# Altium PCB R45_PCBM.PcbDoc (part 3 of 8)
Units mm, origin at the board's own origin, x right, y up, seen from the top; angles counter-clockwise.
Board outline 109 x 109 mm, 4 copper layers (Top Layer, Layer 1, Layer 2, Bottom Layer), stack 0.98 mm thick; 9 components, 0 nets, 14 pads, 1504 vias.
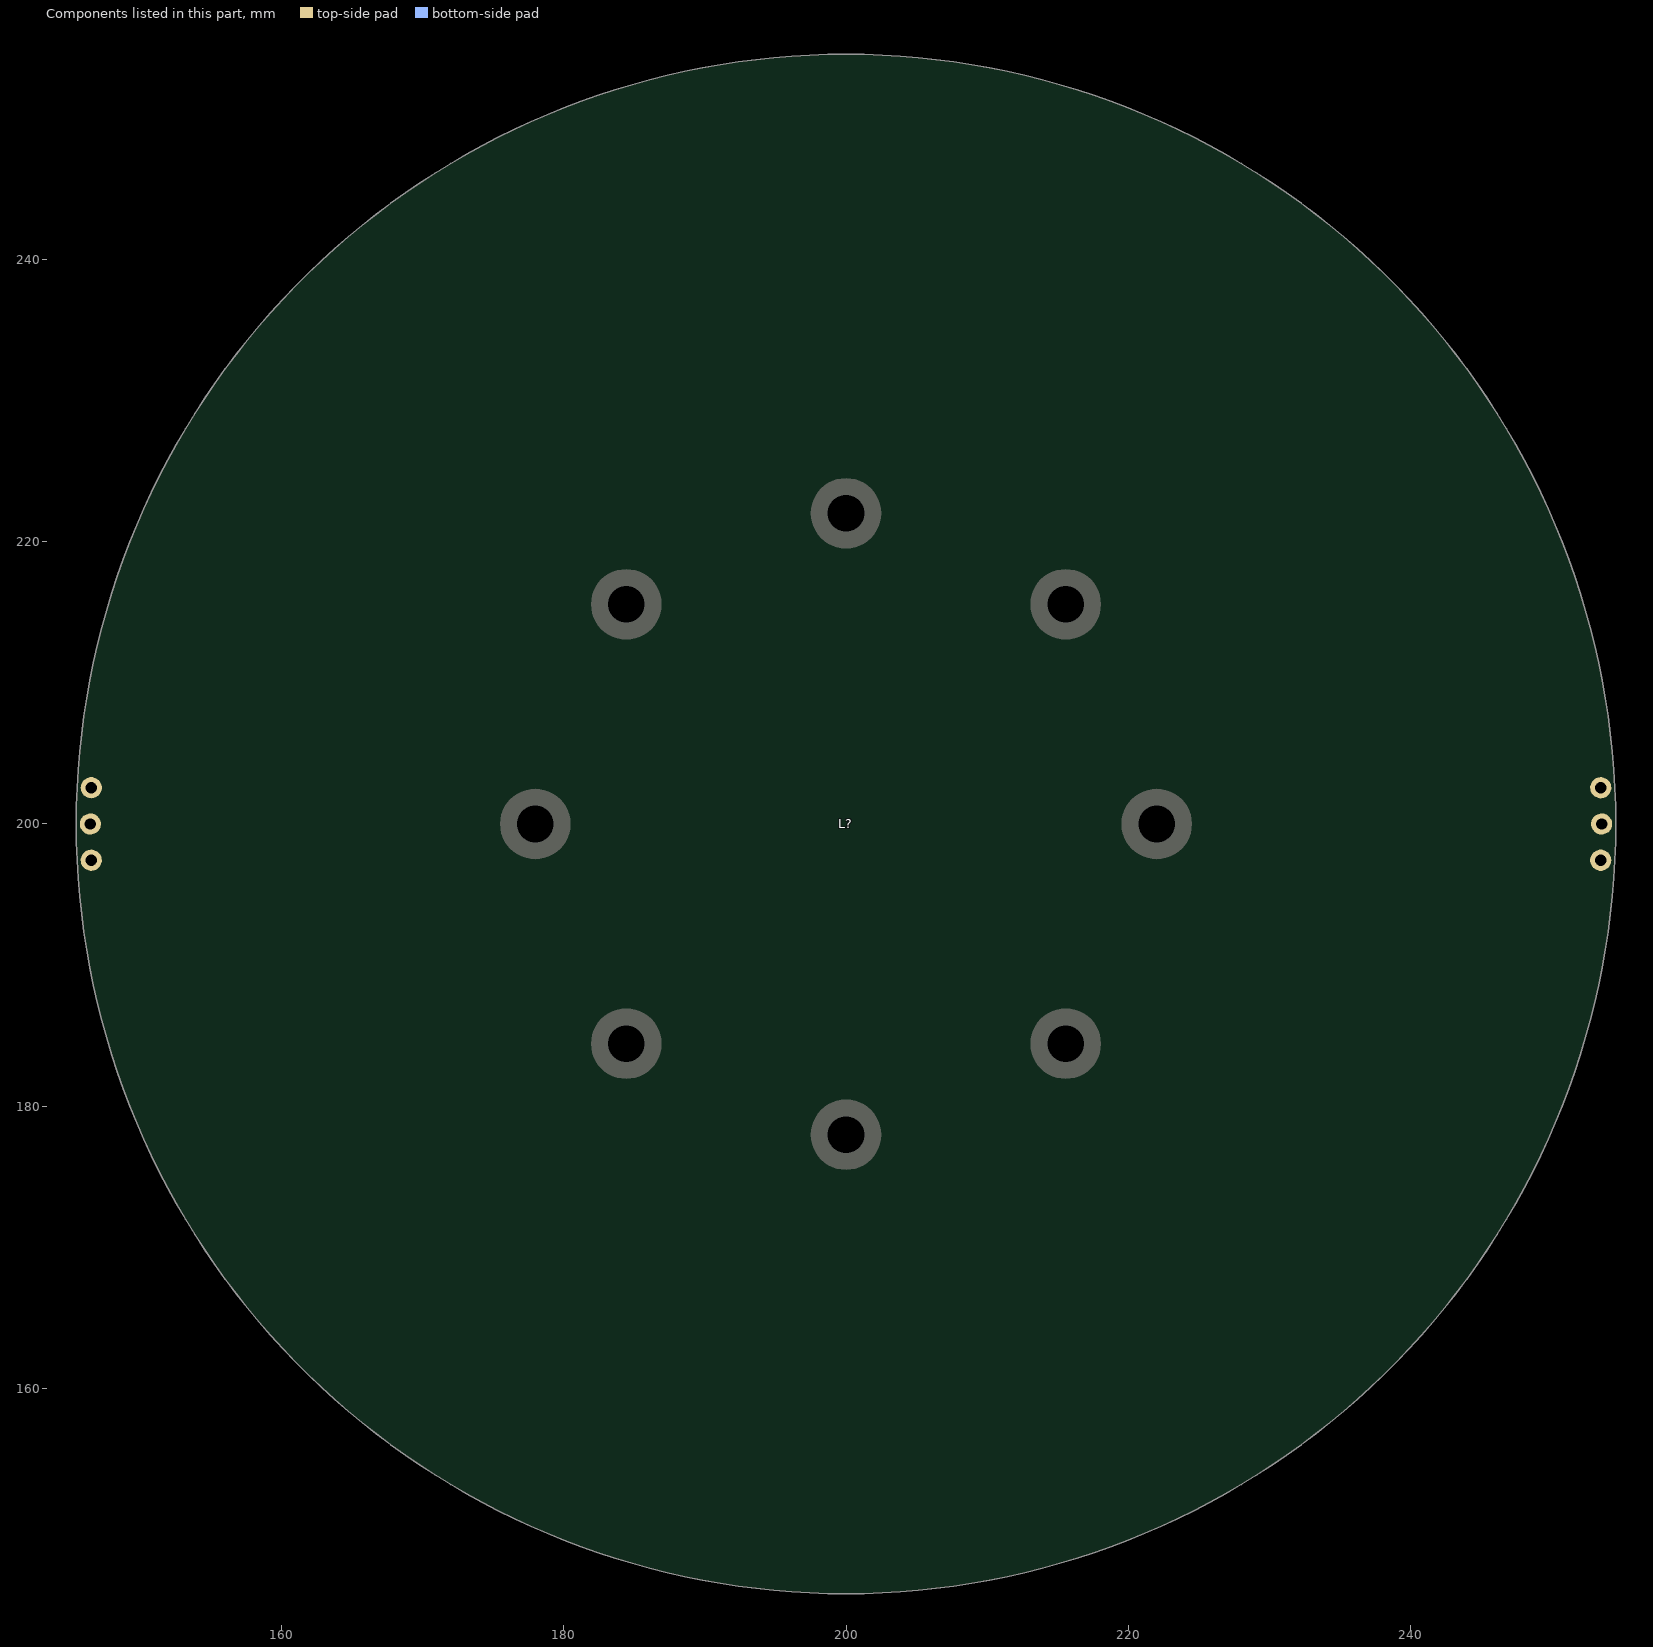
[diagram p5: the components of this part, seen from the top]

## Footprints (in the part's own frame and the unit in brackets; to place one, negate y for a bottom-side part, rotate by r counter-clockwise, add the part's x,y. Pads: shape width x height; smd on the part's side, far side on the other; paste and mask are expansions set on the pad) (continued)
R45_stator [mm] (continued)
  Top Layer region: -49.838,9.302 -49.816,9.357 -49.775,9.399 -49.721,9.422 -49.662,9.422 -49.662,9.422 -28.655,5.332 -28.586,5.299 -28.543,5.236 -28.536,5.159 -28.536,5.159 -28.58,4.912 -28.612,4.842 -28.675,4.798 -28.751,4.79 -28.751,4.79 -48.651,7.936 -48.768,7.931 -48.874,7.882 -48.954,7.796 -48.994,7.686 -48.994,7.686 -49.563,1.731 -49.411,-4.25 -49.411,-4.25 -49.378,-4.362 -49.305,-4.454 -49.202,-4.51 -49.086,-4.523 -49.086,-4.523 -28.868,-2.76 -28.694,-2.709 -28.552,-2.595 -28.464,-2.435 -28.444,-2.254 -28.444,-2.254 -28.421,-2.052 -28.321,-1.874 -28.159,-1.75 -27.962,-1.699 -27.962,-1.699 -27.474,-1.674 -27.332,-1.63 -27.229,-1.523 -27.19,-1.38 -27.19,-1.38 -27.125,2.328 -27.159,2.472 -27.259,2.583 -27.399,2.632 -27.399,2.632 -27.886,2.674 -28.081,2.732 -28.238,2.862 -28.332,3.042 -28.348,3.246 -28.348,3.246 -28.362,3.427 -28.444,3.59 -28.582,3.709 -28.754,3.766 -28.754,3.766 -47.344,6.043 -47.461,6.034 -47.565,5.981 -47.642,5.892 -47.678,5.781 -47.678,5.781 -47.998,1.676 -47.965,-2.441 -47.965,-2.441 -47.937,-2.555 -47.867,-2.649 -47.766,-2.709 -47.65,-2.726 -47.65,-2.726 -29.094,-1.758 -29.019,-1.774 -28.962,-1.825 -28.937,-1.898 -28.937,-1.898 -28.919,-2.148 -28.934,-2.223 -28.984,-2.282 -29.056,-2.308 -29.056,-2.308 -48.759,-4.037 -48.818,-4.031 -48.869,-4.002 -48.906,-3.956 -48.922,-3.9 -48.922,-3.9 -49.047,1.713 -48.531,7.303 -48.531,7.303 -48.511,7.358 -48.471,7.402 -48.418,7.426 -48.359,7.429 -48.359,7.429 -26.312,3.931 -26.247,3.903 -26.201,3.849 -26.186,3.78 -26.186,3.78 -26.302,-2.864 -26.319,-2.932 -26.367,-2.985 -26.433,-3.01 -26.433,-3.01 -50.198,-5.935 -50.257,-5.93 -50.309,-5.904 -50.347,-5.859 -50.365,-5.803 -50.365,-5.803 -50.668,1.769 -49.838,9.302
  Top Layer region: -45.607,-5.984 -45.604,-5.925 -45.578,-5.872 -45.533,-5.833 -45.477,-5.814 -45.477,-5.814 -28.901,-3.784 -28.825,-3.794 -28.764,-3.841 -28.734,-3.912 -28.734,-3.912 -28.699,-4.16 -28.708,-4.236 -28.754,-4.298 -28.824,-4.329 -28.824,-4.329 -45.318,-6.946 -45.377,-6.944 -45.431,-6.919 -45.47,-6.875 -45.49,-6.819 -45.49,-6.819
  Top Layer region: -45.706,-12.639 -45.1,-14.654 -44.406,-16.639 -44.406,-16.639 -44.375,-16.689 -44.327,-16.724 -44.27,-16.737 -44.212,-16.727 -44.212,-16.727 -27.294,-10.227 -27.232,-10.182 -27.2,-10.113 -27.207,-10.036 -27.207,-10.036 -27.293,-9.8 -27.337,-9.737 -27.406,-9.704 -27.483,-9.71 -27.483,-9.71 -43.576,-15.246 -43.692,-15.262 -43.805,-15.232 -43.898,-15.161 -43.957,-15.059 -43.957,-15.059 -44.191,-14.358 -44.414,-13.654 -44.414,-13.654 -44.426,-13.537 -44.392,-13.425 -44.318,-13.334 -44.215,-13.279 -44.215,-13.279 -27.656,-8.211 -27.504,-8.205 -27.368,-8.274 -27.284,-8.4 -27.284,-8.4 -26.672,-10.178 -26.66,-10.33 -26.725,-10.467 -26.848,-10.556 -26.848,-10.556 -42.72,-16.643 -42.77,-16.675 -42.804,-16.724 -42.816,-16.781 -42.805,-16.84 -42.805,-16.84 -42.489,-17.622 -42.457,-17.671 -42.407,-17.704 -42.349,-17.715 -42.291,-17.703 -42.291,-17.703 -25.69,-10.651 -25.631,-10.606 -25.601,-10.538 -25.607,-10.464 -25.607,-10.464 -26.621,-7.519 -26.662,-7.457 -26.727,-7.422 -26.801,-7.423 -26.801,-7.423 -45.6,-12.455 -45.652,-12.481 -45.691,-12.525 -45.71,-12.581 -45.706,-12.639
  Top Layer region: -50.014,-8.304 -50.012,-8.246 -49.987,-8.192 -49.944,-8.152 -49.889,-8.132 -49.889,-8.132 -28.751,-4.79 -28.675,-4.798 -28.612,-4.842 -28.58,-4.912 -28.58,-4.912 -28.536,-5.159 -28.543,-5.236 -28.586,-5.299 -28.655,-5.332 -28.655,-5.332 -48.431,-9.182 -48.54,-9.227 -48.623,-9.309 -48.668,-9.417 -48.668,-9.534 -48.668,-9.534 -47.166,-15.325 -44.978,-20.893 -44.978,-20.893 -44.908,-20.988 -44.808,-21.048 -44.693,-21.066 -44.579,-21.039 -44.579,-21.039 -26.183,-12.467 -26.037,-12.359 -25.942,-12.204 -25.915,-12.024 -25.958,-11.847 -25.958,-11.847 -26.005,-11.649 -25.972,-11.448 -25.862,-11.276 -25.694,-11.16 -25.694,-11.16 -25.245,-10.97 -25.127,-10.88 -25.066,-10.744 -25.078,-10.596 -25.078,-10.596 -26.285,-7.09 -26.367,-6.966 -26.498,-6.896 -26.647,-6.898 -26.647,-6.898 -27.118,-7.025 -27.322,-7.037 -27.514,-6.969 -27.664,-6.831 -27.749,-6.646 -27.749,-6.646 -27.823,-6.48 -27.956,-6.355 -28.126,-6.29 -28.308,-6.296 -28.308,-6.296 -46.556,-10.514 -46.662,-10.562 -46.743,-10.648 -46.784,-10.757 -46.78,-10.874 -46.78,-10.874 -45.677,-14.841 -44.238,-18.699 -44.238,-18.699 -44.172,-18.796 -44.074,-18.86 -43.959,-18.882 -43.844,-18.859 -43.844,-18.859 -26.738,-11.603 -26.662,-11.592 -26.591,-11.62 -26.543,-11.68 -26.543,-11.68 -26.441,-11.909 -26.428,-11.985 -26.455,-12.057 -26.514,-12.106 -26.514,-12.106 -44.438,-20.47 -44.495,-20.484 -44.553,-20.475 -44.603,-20.445 -44.638,-20.397 -44.638,-20.397 -46.675,-15.166 -48.102,-9.736 -48.102,-9.736 -48.102,-9.677 -48.079,-9.623 -48.038,-9.581 -47.983,-9.559 -47.983,-9.559 -26.07,-5.306 -25.999,-5.309 -25.937,-5.345 -25.899,-5.404 -25.899,-5.404 -23.736,-11.687 -23.729,-11.757 -23.756,-11.823 -23.81,-11.869 -23.81,-11.869 -45.141,-22.745 -45.198,-22.761 -45.256,-22.754 -45.307,-22.725 -45.343,-22.679 -45.343,-22.679 -48.217,-15.667 -50.014,-8.304
  Top Layer region: -43.875,-13.813 -43.615,-14.615 -43.586,-14.666 -43.539,-14.703 -43.482,-14.718 -43.423,-14.71 -43.423,-14.71 -27.634,-9.269 -27.571,-9.226 -27.536,-9.157 -27.541,-9.08 -27.541,-9.08 -27.618,-8.842 -27.66,-8.777 -27.728,-8.742 -27.805,-8.745 -27.805,-8.745 -43.777,-13.623 -43.829,-13.651 -43.866,-13.697 -43.882,-13.754 -43.875,-13.813
  Top Layer region: -44.732,-10.718 -44.528,-11.537 -44.503,-11.59 -44.459,-11.63 -44.403,-11.649 -44.344,-11.645 -44.344,-11.645 -28.214,-7.318 -28.147,-7.28 -28.108,-7.214 -28.107,-7.137 -28.107,-7.137 -28.168,-6.894 -28.205,-6.826 -28.27,-6.786 -28.347,-6.784 -28.347,-6.784 -44.62,-10.536 -44.674,-10.56 -44.714,-10.604 -44.735,-10.659 -44.732,-10.718
  Top Layer region: -40.81,-21.222 -40.827,-21.165 -40.821,-21.106 -40.792,-21.054 -40.746,-21.018 -40.746,-21.018 -25.864,-13.44 -25.789,-13.424 -25.715,-13.447 -25.663,-13.503 -25.663,-13.503 -25.545,-13.725 -25.528,-13.8 -25.55,-13.873 -25.605,-13.926 -25.605,-13.926 -40.209,-22.027 -40.266,-22.045 -40.325,-22.04 -40.377,-22.012 -40.414,-21.966 -40.414,-21.966
  Top Layer region: -42.489,17.622 -42.805,16.84 -42.816,16.781 -42.804,16.724 -42.77,16.675 -42.72,16.643 -42.72,16.643 -27.127,10.663 -27.051,10.655 -26.98,10.685 -26.934,10.747 -26.934,10.747 -26.84,10.979 -26.831,11.056 -26.86,11.127 -26.921,11.174 -26.921,11.174 -42.291,17.703 -42.349,17.715 -42.407,17.704 -42.457,17.671 -42.489,17.622
  Top Layer region: -43.137,19.697 -43.968,17.764 -44.713,15.797 -44.713,15.797 -44.721,15.739 -44.706,15.682 -44.671,15.635 -44.62,15.605 -44.62,15.605 -27.483,9.71 -27.406,9.704 -27.337,9.737 -27.293,9.8 -27.293,9.8 -27.207,10.036 -27.2,10.113 -27.232,10.182 -27.294,10.227 -27.294,10.227 -43.181,16.331 -43.28,16.393 -43.347,16.489 -43.373,16.603 -43.353,16.719 -43.353,16.719 -43.082,17.406 -42.799,18.089 -42.799,18.089 -42.734,18.186 -42.636,18.25 -42.521,18.272 -42.406,18.248 -42.406,18.248 -26.463,11.487 -26.343,11.394 -26.284,11.254 -26.301,11.103 -26.3,11.103 -26.974,9.347 -27.063,9.224 -27.201,9.16 -27.352,9.171 -27.352,9.171 -43.423,14.71 -43.482,14.718 -43.539,14.703 -43.586,14.666 -43.615,14.615 -43.615,14.615 -43.875,13.813 -43.882,13.754 -43.866,13.697 -43.829,13.651 -43.777,13.623 -43.777,13.623 -26.526,8.354 -26.452,8.351 -26.385,8.383 -26.342,8.444 -26.342,8.444 -25.226,11.351 -25.217,11.425 -25.245,11.494 -25.303,11.541 -25.303,11.541 -42.937,19.77 -42.994,19.784 -43.052,19.775 -43.103,19.744 -43.137,19.697
  Top Layer region: -41.156,20.542 -41.526,19.785 -41.541,19.727 -41.533,19.669 -41.502,19.618 -41.455,19.583 -41.455,19.583 -26.317,12.529 -26.241,12.516 -26.169,12.541 -26.119,12.599 -26.119,12.599 -26.009,12.825 -25.994,12.9 -26.018,12.973 -26.076,13.024 -26.076,13.024 -40.954,20.61 -41.01,20.626 -41.069,20.619 -41.121,20.59 -41.156,20.542
  Top Layer region: -43.651,25.787 -43.612,25.83 -43.558,25.856 -43.5,25.859 -43.444,25.839 -43.444,25.839 -25.103,14.812 -25.05,14.756 -25.031,14.682 -25.051,14.608 -25.051,14.608 -25.176,14.391 -25.231,14.336 -25.304,14.316 -25.379,14.334 -25.379,14.334 -43.003,24.097 -43.114,24.133 -43.231,24.123 -43.335,24.069 -43.411,23.98 -43.411,23.98 -45.982,18.578 -47.885,12.906 -47.885,12.906 -47.892,12.789 -47.855,12.678 -47.778,12.59 -47.673,12.538 -47.673,12.538 -28.071,7.28 -27.89,7.268 -27.717,7.327 -27.58,7.447 -27.5,7.61 -27.5,7.61 -27.409,7.793 -27.254,7.925 -27.06,7.986 -26.857,7.967 -26.857,7.967 -26.39,7.824 -26.241,7.817 -26.108,7.882 -26.022,8.003 -26.022,8.003 -24.693,11.465 -24.676,11.612 -24.732,11.75 -24.846,11.844 -24.846,11.844 -25.289,12.05 -25.453,12.171 -25.557,12.347 -25.583,12.549 -25.529,12.745 -25.529,12.745 -25.479,12.921 -25.5,13.102 -25.589,13.26 -25.732,13.373 -25.732,13.373 -42.422,21.871 -42.535,21.903 -42.651,21.889 -42.753,21.832 -42.826,21.739 -42.826,21.739 -44.53,17.991 -45.908,14.111 -45.908,14.111 -45.92,13.995 -45.886,13.882 -45.812,13.792 -45.709,13.736 -45.709,13.736 -27.941,8.299 -27.876,8.258 -27.839,8.191 -27.841,8.114 -27.841,8.114 -27.91,7.873 -27.949,7.807 -28.016,7.769 -28.093,7.769 -28.093,7.769 -47.199,12.883 -47.252,12.909 -47.291,12.953 -47.31,13.009 -47.305,13.068 -47.305,13.068 -45.503,18.385 -43.106,23.461 -43.106,23.461 -43.068,23.506 -43.016,23.533 -42.958,23.538 -42.902,23.52 -42.902,23.52 -23.381,12.693 -23.329,12.645 -23.305,12.578 -23.314,12.508 -23.314,12.508 -25.695,6.305 -25.735,6.246 -25.798,6.213 -25.868,6.212 -25.868,6.212 -49.2,11.592 -49.254,11.616 -49.294,11.659 -49.315,11.714 -49.313,11.773 -49.313,11.773 -47.007,18.992 -43.651,25.787
  Top Layer region: -44.904,9.976 -44.88,10.03 -44.837,10.071 -44.782,10.092 -44.723,10.091 -44.723,10.091 -28.452,6.329 -28.384,6.293 -28.343,6.229 -28.339,6.152 -28.339,6.152 -28.391,5.906 -28.426,5.838 -28.49,5.796 -28.566,5.79 -28.566,5.79 -44.961,8.972 -45.016,8.995 -45.057,9.037 -45.08,9.092 -45.079,9.151 -45.079,9.151
  Top Layer region: 29.243,-35.506 29.889,-34.964 29.926,-34.918 29.942,-34.861 29.935,-34.802 29.906,-34.751 29.906,-34.751 18.849,-22.039 18.759,-21.881 18.736,-21.7 18.784,-21.525 18.895,-21.381 18.895,-21.381 19.019,-21.219 19.07,-21.022 19.04,-20.82 18.934,-20.646 18.934,-20.646 18.036,-19.684 17.965,-19.557 17.963,-19.412 18.029,-19.283 18.029,-19.283 21.604,-15.17 21.723,-15.086 21.867,-15.069 22.003,-15.121 22.003,-15.121 23.08,-15.876 23.267,-15.957 23.471,-15.959 23.659,-15.881 23.802,-15.736 23.802,-15.736 23.929,-15.605 24.097,-15.533 24.279,-15.531 24.448,-15.598 24.448,-15.598 38.575,-24.778 38.63,-24.8 38.689,-24.799 38.743,-24.775 38.784,-24.732 38.784,-24.732 39.231,-24.017 39.251,-23.961 39.249,-23.902 39.224,-23.849 39.181,-23.809 39.181,-23.809 22.01,-13.498 21.944,-13.477 21.876,-13.488 21.82,-13.528 21.82,-13.528 16.434,-19.725 16.401,-19.786 16.4,-19.855 16.43,-19.917 16.43,-19.917 29.03,-35.486 29.075,-35.524 29.132,-35.541 29.191,-35.535 29.243,-35.506
  Top Layer region: 30.464,-34.464 31.091,-33.9 31.126,-33.852 31.14,-33.795 31.131,-33.736 31.1,-33.686 31.1,-33.686 19.707,-21.475 19.642,-21.435 19.565,-21.431 19.497,-21.466 19.497,-21.466 19.311,-21.634 19.269,-21.698 19.264,-21.775 19.298,-21.844 19.298,-21.844 30.251,-34.451 30.298,-34.487 30.355,-34.502 30.413,-34.494 30.464,-34.464
  Top Layer region: 31.648,-33.38 32.255,-32.794 32.289,-32.745 32.301,-32.688 32.29,-32.629 32.257,-32.58 32.257,-32.58 20.34,-20.67 20.239,-20.519 20.204,-20.34 20.239,-20.162 20.341,-20.01 20.341,-20.01 20.453,-19.841 20.49,-19.64 20.446,-19.441 20.328,-19.275 20.328,-19.275 20.277,-19.228 20.195,-19.099 20.188,-18.948 20.255,-18.812 20.255,-18.812 21.447,-17.44 21.573,-17.354 21.724,-17.341 21.863,-17.403 21.863,-17.403 21.917,-17.447 22.098,-17.541 22.301,-17.557 22.494,-17.493 22.647,-17.358 22.647,-17.358 22.782,-17.236 22.954,-17.176 23.136,-17.187 23.3,-17.266 23.3,-17.266 36.752,-27.409 36.806,-27.434 36.865,-27.437 36.92,-27.417 36.964,-27.377 36.964,-27.377 37.46,-26.695 37.484,-26.641 37.486,-26.582 37.465,-26.527 37.424,-26.484 37.424,-26.484 21.96,-15.662 21.892,-15.636 21.82,-15.645 21.761,-15.686 21.761,-15.686 18.562,-19.366 18.529,-19.43 18.53,-19.503 18.566,-19.566 18.566,-19.566 31.435,-33.374 31.483,-33.409 31.54,-33.422 31.599,-33.412 31.648,-33.38
  Top Layer region: 34.464,-30.464 34.494,-30.413 34.502,-30.355 34.487,-30.298 34.451,-30.251 34.451,-30.251 21.846,-19.3 21.81,-19.253 21.795,-19.197 21.802,-19.139 21.831,-19.088 21.831,-19.088 21.94,-18.962 21.987,-18.926 22.043,-18.911 22.101,-18.918 22.152,-18.947 22.152,-18.947 34.751,-29.906 34.802,-29.935 34.861,-29.942 34.918,-29.926 34.964,-29.889 34.964,-29.889 35.506,-29.243 35.535,-29.191 35.541,-29.132 35.524,-29.075 35.486,-29.03 35.486,-29.03 21.799,-17.953 21.73,-17.921 21.654,-17.928 21.591,-17.971 21.591,-17.971 20.801,-18.88 20.767,-18.948 20.771,-19.024 20.812,-19.088 20.812,-19.088 33.686,-31.1 33.736,-31.131 33.795,-31.14 33.852,-31.126 33.9,-31.091 33.9,-31.091
  Top Layer region: 32.794,-32.255 33.38,-31.648 33.412,-31.599 33.422,-31.54 33.409,-31.483 33.374,-31.435 33.374,-31.435 21.157,-20.048 21.09,-20.012 21.013,-20.014 20.947,-20.054 20.947,-20.054 20.773,-20.234 20.735,-20.302 20.736,-20.378 20.775,-20.445 20.775,-20.445 32.58,-32.257 32.629,-32.29 32.688,-32.301 32.745,-32.289 32.794,-32.255
  Top Layer region: 35.986,-28.65 36.505,-27.986 36.532,-27.933 36.536,-27.874 36.517,-27.818 36.477,-27.774 36.477,-27.774 23.137,-17.727 23.066,-17.698 22.99,-17.708 22.929,-17.755 22.929,-17.755 22.774,-17.952 22.744,-18.023 22.753,-18.099 22.798,-18.161 22.798,-18.161 35.773,-28.675 35.826,-28.702 35.885,-28.707 35.941,-28.689 35.986,-28.65
  Top Layer region: 37.897,-26.07 38.369,-25.371 38.391,-25.317 38.391,-25.258 38.368,-25.203 38.326,-25.162 38.326,-25.162 24.317,-16.07 24.244,-16.046 24.169,-16.061 24.111,-16.112 24.111,-16.112 23.971,-16.32 23.946,-16.392 23.96,-16.468 24.009,-16.527 24.009,-16.527 37.687,-26.109 37.741,-26.133 37.8,-26.134 37.855,-26.112 37.897,-26.07
  Top Layer region: -13.813,43.875 -13.754,43.882 -13.697,43.866 -13.651,43.829 -13.623,43.777 -13.623,43.777 -8.745,27.805 -8.742,27.728 -8.777,27.66 -8.842,27.618 -8.842,27.618 -9.08,27.541 -9.157,27.536 -9.226,27.571 -9.269,27.634 -9.269,27.634 -14.71,43.423 -14.718,43.482 -14.703,43.539 -14.666,43.586 -14.615,43.615 -14.615,43.615
  Top Layer region: -1.235,49.061 -1.177,49.051 -1.128,49.02 -1.094,48.972 -1.082,48.914 -1.082,48.914 -0.698,26.595 -0.714,26.526 -0.759,26.471 -0.825,26.444 -0.825,26.444 -7.387,25.405 -7.458,25.41 -7.518,25.448 -7.554,25.509 -7.554,25.509 -13.186,43.91 -13.192,43.969 -13.174,44.026 -13.136,44.071 -13.084,44.098 -13.084,44.098 -12.273,44.331 -12.214,44.336 -12.158,44.317 -12.113,44.278 -12.087,44.225 -12.087,44.225 -7.731,27.951 -7.65,27.787 -7.513,27.667 -7.341,27.609 -7.159,27.621 -7.159,27.621 -6.956,27.633 -6.764,27.565 -6.613,27.427 -6.529,27.242 -6.529,27.242 -6.419,26.766 -6.351,26.634 -6.228,26.551 -6.08,26.537 -6.08,26.537 -2.418,27.117 -2.282,27.176 -2.19,27.293 -2.166,27.44 -2.166,27.44 -2.209,27.926 -2.186,28.129 -2.085,28.306 -1.924,28.43 -1.726,28.481 -1.726,28.481 -1.55,28.526 -1.404,28.635 -1.311,28.791 -1.285,28.972 -1.285,28.972 -2.27,47.674 -2.299,47.788 -2.369,47.881 -2.47,47.941 -2.586,47.958 -2.586,47.958 -6.684,47.56 -10.733,46.813 -10.733,46.813 -10.84,46.765 -10.92,46.68 -10.962,46.57 -10.959,46.453 -10.959,46.453 -6.784,28.347 -6.786,28.27 -6.826,28.205 -6.894,28.168 -6.894,28.168 -7.137,28.107 -7.214,28.108 -7.28,28.147 -7.318,28.214 -7.318,28.214 -12.443,47.317 -12.447,47.376 -12.428,47.432 -12.389,47.476 -12.336,47.501 -12.336,47.501 -6.83,48.599 -1.235,49.061
  Top Layer region: -2.866,47.442 -2.808,47.434 -2.757,47.405 -2.722,47.358 -2.707,47.301 -2.707,47.301 -1.758,29.094 -1.774,29.019 -1.825,28.962 -1.898,28.937 -1.898,28.937 -2.148,28.919 -2.223,28.934 -2.282,28.984 -2.308,29.056 -2.308,29.056 -3.802,46.074 -3.834,46.186 -3.908,46.277 -4.011,46.334 -4.127,46.346 -4.127,46.346 -6.476,46.077 -8.808,45.688 -8.808,45.688 -8.916,45.644 -8.999,45.562 -9.045,45.454 -9.045,45.337 -9.045,45.337 -5.733,28.273 -5.668,28.136 -5.543,28.049 -5.392,28.034 -5.392,28.034 -3.535,28.328 -3.396,28.389 -3.304,28.511 -3.284,28.661 -3.284,28.661 -5.36,45.533 -5.356,45.592 -5.329,45.645 -5.284,45.683 -5.227,45.7 -5.227,45.7 -4.389,45.789 -4.33,45.783 -4.277,45.755 -4.24,45.709 -4.223,45.652 -4.223,45.652 -2.657,27.683 -2.669,27.61 -2.714,27.552 -2.782,27.522 -2.782,27.522 -5.859,27.035 -5.932,27.042 -5.994,27.083 -6.028,27.149 -6.028,27.149 -10.435,46.214 -10.437,46.273 -10.416,46.328 -10.376,46.371 -10.322,46.395 -10.322,46.395 -6.615,47.066 -2.866,47.442
  Top Layer region: -7.572,45.371 -8.402,45.224 -8.458,45.203 -8.5,45.162 -8.523,45.107 -8.524,45.048 -8.524,45.048 -5.332,28.655 -5.299,28.586 -5.236,28.543 -5.159,28.536 -5.159,28.536 -4.912,28.58 -4.842,28.612 -4.798,28.675 -4.79,28.751 -4.79,28.751 -7.398,45.247 -7.418,45.302 -7.459,45.345 -7.513,45.369 -7.572,45.371
  Top Layer region: -5.984,45.607 -6.819,45.49 -6.875,45.47 -6.919,45.431 -6.944,45.377 -6.946,45.318 -6.946,45.318 -4.329,28.824 -4.298,28.754 -4.236,28.708 -4.16,28.699 -4.16,28.699 -3.912,28.734 -3.841,28.764 -3.794,28.825 -3.784,28.901 -3.784,28.901 -5.814,45.477 -5.833,45.533 -5.872,45.578 -5.925,45.604 -5.984,45.607
  Top Layer region: 0.422,45.996 -0.422,45.996 -0.48,45.985 -0.529,45.952 -0.561,45.902 -0.572,45.844 -0.572,45.844 -0.275,29.146 -0.254,29.072 -0.2,29.018 -0.125,28.999 -0.125,28.999 0.125,28.999 0.2,29.018 0.254,29.072 0.275,29.146 0.275,29.146 0.572,45.844 0.561,45.902 0.529,45.952 0.48,45.985 0.422,45.996
  Top Layer region: -27.986,36.505 -27.933,36.532 -27.874,36.536 -27.818,36.517 -27.774,36.477 -27.774,36.477 -17.727,23.137 -17.698,23.066 -17.708,22.99 -17.755,22.929 -17.755,22.929 -17.952,22.774 -18.023,22.744 -18.099,22.753 -18.161,22.798 -18.161,22.798 -28.675,35.773 -28.702,35.826 -28.707,35.885 -28.689,35.941 -28.65,35.986 -28.65,35.986
  Top Layer region: -17.941,45.68 -17.883,45.691 -17.825,45.678 -17.777,45.644 -17.746,45.594 -17.746,45.594 -9.752,24.752 -9.743,24.682 -9.767,24.615 -9.819,24.567 -9.819,24.567 -15.631,21.346 -15.699,21.327 -15.768,21.342 -15.823,21.387 -15.823,21.387 -27.409,36.752 -27.434,36.806 -27.437,36.865 -27.417,36.92 -27.377,36.964 -27.377,36.964 -26.695,37.46 -26.641,37.484 -26.582,37.486 -26.527,37.465 -26.484,37.424 -26.484,37.424 -16.824,23.621 -16.693,23.495 -16.523,23.429 -16.341,23.433 -16.174,23.506 -16.174,23.506 -15.987,23.588 -15.784,23.589 -15.595,23.511 -15.453,23.366 -15.453,23.366 -15.187,22.956 -15.077,22.856 -14.933,22.82 -14.79,22.857 -14.79,22.857 -11.547,24.655 -11.439,24.757 -11.393,24.898 -11.42,25.044 -11.42,25.044 -11.627,25.487 -11.675,25.685 -11.641,25.886 -11.531,26.058 -11.363,26.173 -11.363,26.173 -11.213,26.276 -11.113,26.428 -11.079,26.607 -11.116,26.785 -11.116,26.785 -18.439,44.023 -18.505,44.119 -18.603,44.184 -18.718,44.205 -18.833,44.181 -18.833,44.181 -22.548,42.406 -26.097,40.319 -26.097,40.319 -26.181,40.237 -26.227,40.13 -26.229,40.012 -26.186,39.904 -26.186,39.904 -16.07,24.317 -16.046,24.244 -16.061,24.169 -16.112,24.111 -16.112,24.111 -16.32,23.971 -16.392,23.946 -16.468,23.96 -16.527,24.009 -16.527,24.009 -27.876,40.208 -27.9,40.262 -27.901,40.321 -27.879,40.375 -27.838,40.418 -27.838,40.418 -23.04,43.332 -17.941,45.68
  Top Layer region: -18.92,43.601 -18.862,43.613 -18.804,43.603 -18.755,43.571 -18.722,43.522 -18.722,43.522 -11.603,26.738 -11.592,26.662 -11.62,26.591 -11.68,26.543 -11.68,26.543 -11.909,26.441 -11.985,26.428 -12.057,26.455 -12.106,26.514 -12.106,26.514 -19.33,41.995 -19.4,42.089 -19.5,42.15 -19.616,42.168 -19.73,42.14 -19.73,42.14 -21.844,41.083 -23.903,39.921 -23.903,39.921 -23.99,39.842 -24.04,39.736 -24.045,39.619 -24.006,39.509 -24.006,39.509 -15.058,24.607 -14.949,24.501 -14.802,24.462 -14.655,24.499 -14.655,24.499 -13.011,25.411 -12.901,25.516 -12.856,25.661 -12.889,25.81 -12.889,25.81 -20.61,40.954 -20.626,41.01 -20.619,41.069 -20.59,41.121 -20.542,41.156 -20.542,41.156 -19.785,41.526 -19.727,41.541 -19.669,41.533 -19.618,41.502 -19.583,41.455 -19.583,41.455 -11.965,25.105 -11.951,25.032 -11.974,24.962 -12.028,24.911 -12.028,24.911 -14.752,23.401 -14.824,23.382 -14.896,23.4 -14.95,23.45 -14.95,23.45 -25.612,39.858 -25.634,39.913 -25.633,39.972 -25.61,40.026 -25.567,40.066 -25.567,40.066 -22.313,41.966 -18.92,43.601
  Top Layer region: -22.633,40.045 -23.363,39.623 -23.408,39.584 -23.434,39.531 -23.437,39.472 -23.417,39.416 -23.417,39.416 -14.812,25.103 -14.756,25.05 -14.682,25.031 -14.608,25.051 -14.608,25.051 -14.391,25.176 -14.336,25.231 -14.316,25.304 -14.334,25.379 -14.334,25.379 -22.427,39.988 -22.465,40.033 -22.518,40.06 -22.577,40.064 -22.633,40.045
  Top Layer region: -21.222,40.81 -21.966,40.414 -22.012,40.377 -22.04,40.325 -22.045,40.266 -22.027,40.209 -22.027,40.209 -13.926,25.605 -13.873,25.55 -13.8,25.528 -13.725,25.545 -13.725,25.545 -13.503,25.663 -13.447,25.715 -13.424,25.789 -13.44,25.864 -13.44,25.864 -21.018,40.746 -21.054,40.792 -21.106,40.821 -21.165,40.827 -21.222,40.81
  Top Layer region: -15.335,43.367 -16.128,43.078 -16.178,43.047 -16.213,43 -16.227,42.942 -16.217,42.884 -16.217,42.884 -10.227,27.294 -10.182,27.232 -10.113,27.2 -10.036,27.207 -10.036,27.207 -9.8,27.293 -9.737,27.337 -9.704,27.406 -9.71,27.483 -9.71,27.483 -15.142,43.275 -15.172,43.326 -15.22,43.361 -15.277,43.376 -15.335,43.367
  Top Layer lines w1.1: -53.386,3.499 -51.579,4.513 ; -51.553,4.511 cw(c0,0) -38.458,34.628 ; -38.458,34.628 -33.813,30.446 ; -14.06,43.273 -15.498,47.699 cw(c0,0) 37.272,-33.559 33.813,-30.446 ; 14.06,-43.273 16.003,-49.252 ; 16.002,-49.252 ccw(c0.018,-0.033) 51.573,-4.512 ; 51.579,-4.513 53.385,-3.499
  Layer 1 region: -16.128,-43.078 -15.335,-43.367 -15.277,-43.376 -15.22,-43.361 -15.172,-43.326 -15.142,-43.275 -15.142,-43.275 -9.71,-27.483 -9.704,-27.406 -9.737,-27.337 -9.8,-27.293 -9.8,-27.293 -10.036,-27.207 -10.113,-27.2 -10.182,-27.232 -10.227,-27.294 -10.227,-27.294 -16.217,-42.884 -16.227,-42.942 -16.213,-43 -16.178,-43.047 -16.128,-43.078
  Layer 1 region: -17.622,-42.489 -17.671,-42.457 -17.704,-42.407 -17.715,-42.349 -17.703,-42.291 -17.703,-42.291 -11.174,-26.921 -11.127,-26.86 -11.056,-26.831 -10.979,-26.84 -10.979,-26.84 -10.747,-26.934 -10.685,-26.98 -10.655,-27.051 -10.663,-27.127 -10.663,-27.127 -16.643,-42.72 -16.675,-42.77 -16.724,-42.804 -16.781,-42.816 -16.84,-42.805 -16.84,-42.805
  Layer 1 region: -2.027,-45.954 -2.084,-45.94 -2.132,-45.905 -2.163,-45.854 -2.171,-45.796 -2.171,-45.796 -1.292,-29.119 -1.269,-29.046 -1.212,-28.994 -1.137,-28.977 -1.137,-28.977 -0.887,-28.985 -0.813,-29.008 -0.76,-29.063 -0.742,-29.138 -0.742,-29.138 -1.029,-45.836 -1.041,-45.894 -1.075,-45.942 -1.125,-45.973 -1.184,-45.983 -1.184,-45.983
  Layer 1 region: -13.533,-45.562 -13.585,-45.534 -13.622,-45.489 -13.64,-45.432 -13.634,-45.374 -13.634,-45.374 -8.299,-27.941 -8.258,-27.876 -8.191,-27.839 -8.114,-27.841 -8.114,-27.841 -7.873,-27.91 -7.807,-27.949 -7.769,-28.016 -7.769,-28.093 -7.769,-28.093 -12.186,-44.595 -12.193,-44.712 -12.156,-44.823 -12.078,-44.911 -11.973,-44.963 -11.973,-44.963 -9.674,-45.513 -7.35,-45.946 -7.35,-45.946 -7.233,-45.941 -7.126,-45.892 -7.047,-45.806 -7.006,-45.696 -7.006,-45.696 -4.282,-28.529 -4.297,-28.378 -4.384,-28.254 -4.521,-28.188 -4.521,-28.188 -6.367,-27.829 -6.519,-27.839 -6.646,-27.921 -6.717,-28.056 -6.717,-28.056 -10.536,-44.62 -10.56,-44.674 -10.604,-44.714 -10.659,-44.735 -10.718,-44.732 -10.718,-44.732 -11.537,-44.528 -11.59,-44.503 -11.63,-44.459 -11.649,-44.403 -11.645,-44.344 -11.645,-44.344 -6.972,-26.922 -6.936,-26.858 -6.873,-26.818 -6.798,-26.814 -6.798,-26.814 -3.741,-27.408 -3.674,-27.44 -3.631,-27.5 -3.621,-27.574 -3.621,-27.574 -6,-46.996 -6.019,-47.052 -6.057,-47.097 -6.11,-47.123 -6.169,-47.127 -6.169,-47.127 -9.882,-46.49 -13.533,-45.562
  Layer 1 region: -15.619,-46.525 -15.67,-46.496 -15.706,-46.449 -15.721,-46.392 -15.713,-46.334 -15.713,-46.334 -8.44,-25.23 -8.402,-25.17 -8.34,-25.135 -8.269,-25.131 -8.269,-25.131 -1.747,-26.399 -1.683,-26.429 -1.639,-26.485 -1.626,-26.554 -1.626,-26.554 -2.628,-45.772 -2.642,-45.829 -2.678,-45.876 -2.729,-45.906 -2.788,-45.914 -2.788,-45.914 -3.629,-45.855 -3.686,-45.839 -3.733,-45.803 -3.762,-45.751 -3.768,-45.692 -3.768,-45.692 -2.295,-28.909 -2.315,-28.728 -2.402,-28.568 -2.544,-28.454 -2.719,-28.404 -2.719,-28.404 -2.915,-28.346 -3.072,-28.216 -3.166,-28.035 -3.182,-27.832 -3.182,-27.832 -3.122,-27.347 -3.141,-27.2 -3.229,-27.08 -3.363,-27.016 -3.363,-27.016 -7.002,-26.309 -7.151,-26.317 -7.277,-26.396 -7.349,-26.526 -7.349,-26.526 -7.476,-26.998 -7.567,-27.18 -7.722,-27.312 -7.916,-27.374 -8.119,-27.354 -8.119,-27.354 -8.3,-27.336 -8.474,-27.388 -8.615,-27.503 -8.702,-27.664 -8.702,-27.664 -14.172,-45.575 -14.184,-45.692 -14.15,-45.804 -14.076,-45.895 -13.973,-45.95 -13.973,-45.95 -9.986,-46.978 -5.925,-47.661 -5.925,-47.661 -5.808,-47.652 -5.703,-47.6 -5.627,-47.511 -5.59,-47.4 -5.59,-47.4 -3.321,-28.958 -3.292,-28.886 -3.232,-28.839 -3.156,-28.827 -3.156,-28.827 -2.906,-28.853 -2.835,-28.88 -2.786,-28.94 -2.773,-29.015 -2.773,-29.015 -4.491,-48.719 -4.507,-48.776 -4.544,-48.822 -4.596,-48.85 -4.655,-48.856 -4.655,-48.856 -10.204,-48.005 -15.619,-46.525
  Layer 1 region: -8.402,-45.224 -7.572,-45.371 -7.513,-45.369 -7.459,-45.345 -7.418,-45.302 -7.398,-45.247 -7.398,-45.247 -4.79,-28.751 -4.798,-28.675 -4.842,-28.612 -4.912,-28.58 -4.912,-28.58 -5.159,-28.536 -5.236,-28.543 -5.299,-28.586 -5.332,-28.655 -5.332,-28.655 -8.524,-45.048 -8.523,-45.107 -8.5,-45.162 -8.458,-45.203 -8.402,-45.224
  Layer 1 region: -9.976,-44.904 -9.151,-45.079 -9.092,-45.08 -9.037,-45.057 -8.995,-45.016 -8.972,-44.961 -8.972,-44.961 -5.79,-28.566 -5.796,-28.49 -5.838,-28.426 -5.906,-28.391 -5.906,-28.391 -6.152,-28.339 -6.229,-28.343 -6.293,-28.384 -6.329,-28.452 -6.329,-28.452 -10.091,-44.723 -10.092,-44.782 -10.071,-44.837 -10.03,-44.88 -9.976,-44.904
  Layer 1 region: -24.732,-38.784 -24.017,-39.231 -23.961,-39.251 -23.902,-39.249 -23.849,-39.224 -23.809,-39.181 -23.809,-39.181 -15.211,-24.863 -15.19,-24.789 -15.208,-24.715 -15.261,-24.659 -15.261,-24.659 -15.473,-24.526 -15.547,-24.503 -15.622,-24.52 -15.679,-24.571 -15.679,-24.571 -24.778,-38.575 -24.8,-38.63 -24.799,-38.689 -24.775,-38.743 -24.732,-38.784
  Layer 1 region: -28.3,-38.185 -28.339,-38.142 -28.359,-38.086 -28.356,-38.028 -28.33,-37.975 -28.33,-37.975 -17.354,-23.418 -17.294,-23.37 -17.218,-23.359 -17.147,-23.387 -17.147,-23.387 -16.944,-23.534 -16.895,-23.594 -16.882,-23.669 -16.909,-23.742 -16.909,-23.742 -26.703,-37.738 -26.751,-37.845 -26.753,-37.963 -26.71,-38.072 -26.629,-38.156 -26.629,-38.156 -24.657,-39.459 -22.621,-40.661 -22.621,-40.661 -22.509,-40.697 -22.393,-40.687 -22.289,-40.634 -22.213,-40.544 -22.213,-40.544 -13.782,-25.344 -13.744,-25.197 -13.783,-25.05 -13.889,-24.941 -13.889,-24.941 -15.501,-23.973 -15.647,-23.93 -15.795,-23.964 -15.907,-24.067 -15.907,-24.067 -25.162,-38.326 -25.203,-38.368 -25.258,-38.391 -25.317,-38.391 -25.371,-38.369 -25.371,-38.369 -26.07,-37.897 -26.112,-37.855 -26.134,-37.8 -26.133,-37.741 -26.109,-37.687 -26.109,-37.687 -15.759,-22.914 -15.703,-22.866 -15.631,-22.85 -15.559,-22.872 -15.559,-22.872 -12.89,-24.476 -12.838,-24.529 -12.817,-24.6 -12.833,-24.672 -12.833,-24.672 -21.712,-42.11 -21.749,-42.156 -21.8,-42.185 -21.858,-42.191 -21.915,-42.175 -21.915,-42.175 -25.187,-40.307 -28.3,-38.185
  Layer 1 region: -30.59,-38.377 -30.628,-38.332 -30.645,-38.276 -30.64,-38.218 -30.613,-38.166 -30.613,-38.166 -16.56,-20.822 -16.504,-20.779 -16.434,-20.766 -16.366,-20.787 -16.366,-20.787 -10.671,-24.21 -10.62,-24.259 -10.599,-24.327 -10.61,-24.397 -10.61,-24.397 -18.124,-42.113 -18.158,-42.162 -18.207,-42.194 -18.265,-42.204 -18.323,-42.191 -18.323,-42.191 -19.094,-41.848 -19.142,-41.814 -19.173,-41.764 -19.182,-41.705 -19.169,-41.648 -19.169,-41.648 -12.044,-26.381 -12.001,-26.204 -12.029,-26.024 -12.123,-25.868 -12.27,-25.761 -12.27,-25.761 -12.434,-25.639 -12.537,-25.464 -12.564,-25.262 -12.509,-25.065 -12.509,-25.065 -12.287,-24.63 -12.255,-24.485 -12.296,-24.342 -12.4,-24.237 -12.4,-24.237 -15.578,-22.327 -15.721,-22.285 -15.866,-22.315 -15.979,-22.412 -15.979,-22.412 -16.259,-22.813 -16.406,-22.953 -16.597,-23.024 -16.801,-23.015 -16.985,-22.928 -16.985,-22.928 -17.149,-22.848 -17.331,-22.838 -17.503,-22.898 -17.638,-23.019 -17.638,-23.019 -28.905,-37.98 -28.956,-38.085 -28.963,-38.202 -28.924,-38.313 -28.846,-38.4 -28.846,-38.4 -25.451,-40.73 -21.869,-42.76 -21.869,-42.76 -21.756,-42.792 -21.64,-42.778 -21.537,-42.721 -21.465,-42.629 -21.465,-42.629 -13.024,-26.076 -12.973,-26.018 -12.9,-25.994 -12.825,-26.009 -12.825,-26.009 -12.599,-26.119 -12.541,-26.169 -12.516,-26.241 -12.529,-26.317 -12.529,-26.317 -20.883,-44.245 -20.918,-44.293 -20.968,-44.323 -21.027,-44.332 -21.084,-44.317 -21.084,-44.317 -26.007,-41.62 -30.59,-38.377
  Layer 1 region: -29.889,-34.964 -29.243,-35.506 -29.191,-35.535 -29.132,-35.541 -29.075,-35.524 -29.03,-35.486 -29.03,-35.486 -18.524,-22.504 -18.492,-22.434 -18.5,-22.358 -18.544,-22.295 -18.544,-22.295 -18.736,-22.134 -18.806,-22.101 -18.882,-22.107 -18.946,-22.15 -18.946,-22.15 -29.906,-34.751 -29.935,-34.802 -29.942,-34.861 -29.926,-34.918 -29.889,-34.964
  Layer 1 region: -36.505,-27.986 -35.986,-28.65 -35.941,-28.689 -35.885,-28.707 -35.826,-28.702 -35.773,-28.675 -35.773,-28.675 -22.798,-18.161 -22.753,-18.099 -22.744,-18.023 -22.774,-17.952 -22.774,-17.952 -22.929,-17.755 -22.99,-17.708 -23.066,-17.698 -23.137,-17.727 -23.137,-17.727 -36.477,-27.774 -36.517,-27.818 -36.536,-27.874 -36.532,-27.933 -36.505,-27.986
  Layer 1 region: -40.045,-22.633 -39.623,-23.363 -39.584,-23.408 -39.531,-23.434 -39.472,-23.437 -39.416,-23.417 -39.416,-23.417 -25.103,-14.812 -25.05,-14.756 -25.031,-14.682 -25.051,-14.608 -25.051,-14.608 -25.176,-14.391 -25.23,-14.336 -25.304,-14.316 -25.379,-14.334 -25.379,-14.334 -39.988,-22.427 -40.033,-22.465 -40.06,-22.518 -40.064,-22.577 -40.045,-22.633
  Layer 1 region: -39.653,-26.203 -39.675,-26.149 -39.675,-26.09 -39.652,-26.036 -39.61,-25.995 -39.61,-25.995 -24.317,-16.07 -24.244,-16.046 -24.169,-16.061 -24.111,-16.112 -24.111,-16.112 -23.971,-16.32 -23.946,-16.392 -23.96,-16.468 -24.009,-16.527 -24.009,-16.527 -38,-26.329 -38.081,-26.414 -38.124,-26.523 -38.121,-26.64 -38.074,-26.747 -38.074,-26.747 -36.666,-28.647 -35.164,-30.472 -35.164,-30.472 -35.071,-30.544 -34.958,-30.575 -34.842,-30.56 -34.74,-30.502 -34.74,-30.502 -21.619,-19.102 -21.533,-18.977 -21.52,-18.825 -21.582,-18.687 -21.582,-18.687 -22.766,-17.225 -22.888,-17.135 -23.039,-17.117 -23.179,-17.175 -23.179,-17.175 -36.752,-27.409 -36.806,-27.434 -36.865,-27.437 -36.92,-27.417 -36.964,-27.377 -36.964,-27.377 -37.46,-26.695 -37.484,-26.641 -37.486,-26.582 -37.465,-26.527 -37.424,-26.484 -37.424,-26.484 -22.646,-16.142 -22.577,-16.116 -22.503,-16.126 -22.444,-16.171 -22.444,-16.171 -20.484,-18.591 -20.453,-18.659 -20.458,-18.733 -20.498,-18.795 -20.498,-18.795 -34.805,-32.144 -34.855,-32.175 -34.913,-32.185 -34.971,-32.171 -35.018,-32.136 -35.018,-32.136 -37.453,-29.262 -39.653,-26.203
  Layer 1 region: -41.871,-25.6 -41.891,-25.545 -41.889,-25.487 -41.864,-25.433 -41.82,-25.394 -41.82,-25.394 -22.683,-13.902 -22.615,-13.881 -22.545,-13.893 -22.489,-13.936 -22.489,-13.936 -18.307,-19.1 -18.277,-19.164 -18.28,-19.235 -18.314,-19.297 -18.314,-19.297 -31.435,-33.374 -31.483,-33.409 -31.54,-33.422 -31.599,-33.412 -31.648,-33.38 -31.648,-33.38 -32.255,-32.794 -32.289,-32.745 -32.301,-32.688 -32.29,-32.629 -32.257,-32.58 -32.257,-32.58 -20.34,-20.67 -20.239,-20.519 -20.204,-20.34 -20.239,-20.162 -20.341,-20.01 -20.341,-20.01 -20.453,-19.841 -20.49,-19.64 -20.446,-19.441 -20.328,-19.275 -20.328,-19.275 -19.97,-18.942 -19.89,-18.817 -19.88,-18.669 -19.942,-18.534 -19.942,-18.534 -22.275,-15.653 -22.394,-15.564 -22.541,-15.543 -22.68,-15.596 -22.68,-15.596 -23.08,-15.876 -23.267,-15.957 -23.471,-15.959 -23.659,-15.881 -23.802,-15.736 -23.802,-15.736 -23.929,-15.605 -24.097,-15.533 -24.279,-15.531 -24.448,-15.598 -24.448,-15.598 -40.152,-25.803 -40.236,-25.885 -40.282,-25.993 -40.283,-26.11 -40.24,-26.218 -40.24,-26.218 -37.846,-29.569 -35.175,-32.702 -35.175,-32.702 -35.08,-32.77 -34.966,-32.797 -34.85,-32.779 -34.75,-32.717 -34.75,-32.717 -21.157,-20.048 -21.09,-20.012 -21.013,-20.014 -20.947,-20.054 -20.947,-20.054 -20.773,-20.234 -20.735,-20.302 -20.736,-20.378 -20.775,-20.445 -20.775,-20.445 -34.757,-34.435 -34.805,-34.467 -34.863,-34.479 -34.921,-34.467 -34.97,-34.434 -34.97,-34.434 -38.673,-30.215 -41.871,-25.6
  Layer 1 region: -35.506,-29.243 -34.964,-29.889 -34.918,-29.926 -34.861,-29.942 -34.802,-29.935 -34.751,-29.906 -34.751,-29.906 -22.15,-18.946 -22.107,-18.882 -22.101,-18.806 -22.134,-18.736 -22.134,-18.736 -22.295,-18.544 -22.358,-18.5 -22.434,-18.492 -22.504,-18.524 -22.504,-18.524 -35.486,-29.03 -35.524,-29.075 -35.541,-29.132 -35.535,-29.191 -35.506,-29.243
  Layer 1 region: -31.091,-33.9 -31.126,-33.852 -31.14,-33.795 -31.131,-33.736 -31.1,-33.686 -31.1,-33.686 -19.707,-21.475 -19.642,-21.435 -19.565,-21.431 -19.497,-21.466 -19.497,-21.466 -19.311,-21.634 -19.269,-21.698 -19.264,-21.775 -19.298,-21.844 -19.298,-21.844 -30.251,-34.451 -30.298,-34.487 -30.355,-34.502 -30.413,-34.494 -30.464,-34.464 -30.464,-34.464
  Layer 1 region: -23.363,-39.623 -22.633,-40.045 -22.577,-40.064 -22.518,-40.06 -22.465,-40.033 -22.427,-39.988 -22.427,-39.988 -14.334,-25.379 -14.316,-25.304 -14.336,-25.231 -14.391,-25.176 -14.391,-25.176 -14.608,-25.051 -14.682,-25.031 -14.756,-25.05 -14.812,-25.104 -14.812,-25.103 -23.417,-39.416 -23.437,-39.472 -23.434,-39.531 -23.408,-39.584 -23.363,-39.623
  Layer 1 region: -29.243,35.506 -29.889,34.964 -29.926,34.918 -29.942,34.861 -29.935,34.802 -29.906,34.751 -29.906,34.751 -18.946,22.15 -18.882,22.107 -18.806,22.101 -18.736,22.134 -18.736,22.134 -18.544,22.295 -18.5,22.358 -18.492,22.434 -18.524,22.504 -18.524,22.504 -29.03,35.486 -29.075,35.524 -29.132,35.541 -29.191,35.535 -29.243,35.506
  Layer 1 region: -38.784,24.732 -38.743,24.775 -38.689,24.799 -38.63,24.8 -38.575,24.778 -38.575,24.778 -24.571,15.679 -24.52,15.622 -24.503,15.547 -24.526,15.473 -24.526,15.473 -24.659,15.261 -24.715,15.208 -24.789,15.19 -24.863,15.211 -24.863,15.211 -39.181,23.809 -39.224,23.849 -39.249,23.902 -39.251,23.961 -39.231,24.017 -39.231,24.017
  Layer 1 region: -32.691,34.501 -32.641,34.532 -32.583,34.542 -32.526,34.528 -32.478,34.494 -32.478,34.494 -20.048,21.157 -20.012,21.09 -20.014,21.013 -20.054,20.947 -20.054,20.947 -20.234,20.773 -20.302,20.735 -20.378,20.736 -20.445,20.775 -20.445,20.775 -32.528,32.851 -32.625,32.916 -32.74,32.939 -32.855,32.916 -32.952,32.85 -32.952,32.85 -34.578,31.134 -36.115,29.338 -36.115,29.338 -36.17,29.234 -36.181,29.118 -36.146,29.006 -36.071,28.916 -36.071,28.916 -22.566,17.973 -22.427,17.911 -22.276,17.924 -22.151,18.009 -22.151,18.009 -20.917,19.429 -20.85,19.565 -20.858,19.716 -20.939,19.845 -20.939,19.845 -33.374,31.435 -33.409,31.483 -33.422,31.54 -33.412,31.599 -33.38,31.648 -33.38,31.648 -32.794,32.255 -32.745,32.289 -32.688,32.301 -32.629,32.29 -32.58,32.257 -32.58,32.257 -19.829,19.499 -19.792,19.435 -19.789,19.361 -19.822,19.295 -19.822,19.295 -21.866,16.944 -21.927,16.902 -22.001,16.894 -22.069,16.923 -22.069,16.923 -37.7,28.695 -37.739,28.739 -37.758,28.794 -37.755,28.853 -37.729,28.906 -37.729,28.906 -35.321,31.803 -32.691,34.501
  Layer 1 region: -32.482,36.789 -32.431,36.819 -32.373,36.826 -32.316,36.811 -32.27,36.775 -32.27,36.775 -17.63,19.924 -17.597,19.861 -17.597,19.79 -17.63,19.727 -17.63,19.727 -21.989,14.713 -22.047,14.672 -22.117,14.662 -22.184,14.685 -22.184,14.685 -38.326,25.162 -38.368,25.203 -38.391,25.258 -38.391,25.317 -38.369,25.371 -38.369,25.371 -37.897,26.07 -37.855,26.112 -37.8,26.134 -37.741,26.133 -37.687,26.109 -37.687,26.109 -23.888,16.442 -23.722,16.369 -23.54,16.365 -23.37,16.431 -23.239,16.557 -23.239,16.557 -23.091,16.697 -22.9,16.768 -22.696,16.76 -22.512,16.672 -22.512,16.672 -22.122,16.378 -21.985,16.32 -21.838,16.336 -21.715,16.42 -21.715,16.42 -19.283,19.219 -19.216,19.351 -19.221,19.5 -19.297,19.628 -19.297,19.628 -19.643,19.973 -19.755,20.143 -19.792,20.343 -19.748,20.542 -19.63,20.708 -19.63,20.708 -19.523,20.856 -19.482,21.033 -19.511,21.213 -19.607,21.368 -19.607,21.368 -32.383,35.061 -32.478,35.13 -32.593,35.156 -32.708,35.137 -32.808,35.076 -32.808,35.076 -35.691,32.137 -38.313,28.962 -38.313,28.962 -38.364,28.856 -38.371,28.739 -38.332,28.629 -38.254,28.541 -38.254,28.541 -23.418,17.354 -23.37,17.294 -23.359,17.218 -23.387,17.147 -23.387,17.147 -23.534,16.944 -23.594,16.895 -23.669,16.882 -23.742,16.909 -23.742,16.909 -39.947,28.249 -39.987,28.292 -40.009,28.346 -40.007,28.405 -39.983,28.459 -39.983,28.459 -36.471,32.839 -32.482,36.789
  Layer 1 region: -34.964,29.889 -35.506,29.243 -35.535,29.191 -35.541,29.132 -35.524,29.075 -35.486,29.03 -35.486,29.03 -22.504,18.524 -22.434,18.492 -22.358,18.5 -22.295,18.544 -22.295,18.544 -22.134,18.736 -22.101,18.806 -22.107,18.882 -22.15,18.946 -22.15,18.946 -34.751,29.906 -34.802,29.935 -34.861,29.942 -34.918,29.926 -34.964,29.889
  Layer 1 region: -33.9,31.091 -34.464,30.464 -34.494,30.413 -34.502,30.355 -34.487,30.298 -34.451,30.251 -34.451,30.251 -21.844,19.298 -21.775,19.264 -21.698,19.269 -21.634,19.311 -21.634,19.311 -21.466,19.497 -21.431,19.565 -21.435,19.642 -21.475,19.707 -21.475,19.707 -33.686,31.1 -33.736,31.131 -33.795,31.14 -33.852,31.126 -33.9,31.091
  Layer 1 region: 20.384,-42.816 20.327,-42.831 20.269,-42.822 20.219,-42.792 20.184,-42.744 20.184,-42.744 12.529,-26.317 12.516,-26.241 12.541,-26.169 12.599,-26.119 12.599,-26.119 12.825,-26.009 12.9,-25.994 12.973,-26.018 13.024,-26.076 13.024,-26.076 20.755,-41.237 20.828,-41.329 20.93,-41.386 21.046,-41.4 21.159,-41.368 21.159,-41.368 21.814,-41.026 22.464,-40.674 22.464,-40.674 22.553,-40.599 22.607,-40.494 22.617,-40.378 22.581,-40.266 22.581,-40.266 14.336,-25.381 14.298,-25.337 14.246,-25.31 14.188,-25.305 14.132,-25.323 14.132,-25.323 13.986,-25.404 13.942,-25.441 13.915,-25.493 13.91,-25.552 13.928,-25.607 13.928,-25.607 22.027,-40.209 22.045,-40.266 22.04,-40.325 22.012,-40.377 21.966,-40.414 21.966,-40.414 21.222,-40.81 21.165,-40.827 21.106,-40.821 21.054,-40.792 21.018,-40.746 21.018,-40.746 13.028,-25.055 13.012,-24.981 13.034,-24.908 13.089,-24.856 13.089,-24.856 14.143,-24.272 14.216,-24.253 14.29,-24.273 14.344,-24.326 14.344,-24.326 24.15,-40.635 24.17,-40.691 24.167,-40.749 24.142,-40.803 24.098,-40.842 24.098,-40.842 22.263,-41.87 20.384,-42.816
  Layer 1 region: 19.457,-44.868 19.399,-44.88 19.342,-44.87 19.292,-44.838 19.259,-44.789 19.259,-44.789 10.754,-24.736 10.743,-24.664 10.766,-24.596 10.819,-24.546 10.819,-24.546 15.083,-22.183 15.153,-22.164 15.224,-22.18 15.279,-22.228 15.279,-22.228 26.109,-37.687 26.133,-37.741 26.134,-37.8 26.112,-37.855 26.07,-37.897 26.07,-37.897 25.371,-38.369 25.317,-38.391 25.257,-38.391 25.203,-38.368 25.162,-38.326 25.162,-38.326 15.99,-24.194 15.863,-24.063 15.695,-23.991 15.513,-23.989 15.344,-24.056 15.344,-24.056 15.155,-24.131 14.951,-24.126 14.765,-24.041 14.628,-23.891 14.628,-23.891 14.592,-23.831 14.483,-23.725 14.336,-23.686 14.189,-23.723 14.189,-23.723 12.599,-24.605 12.49,-24.71 12.445,-24.855 12.478,-25.003 12.478,-25.003 12.509,-25.065 12.564,-25.262 12.537,-25.464 12.434,-25.639 12.27,-25.761 12.27,-25.761 12.123,-25.868 12.029,-26.024 12.001,-26.204 12.044,-26.381 12.044,-26.381 19.911,-43.239 19.98,-43.333 20.081,-43.394 20.196,-43.412 20.31,-43.384 20.31,-43.384 22.489,-42.295 24.61,-41.098 24.61,-41.098 24.696,-41.019 24.746,-40.913 24.752,-40.796 24.713,-40.686 24.713,-40.686 15.211,-24.863 15.19,-24.789 15.208,-24.715 15.261,-24.659 15.261,-24.659 15.473,-24.526 15.547,-24.503 15.622,-24.52 15.679,-24.571 15.679,-24.571 26.362,-41.012 26.384,-41.067 26.383,-41.126 26.36,-41.18 26.317,-41.22 26.317,-41.22 22.96,-43.181 19.457,-44.868
  Layer 1 region: 16.863,-47.812 16.805,-47.82 16.748,-47.806 16.701,-47.77 16.671,-47.719 16.671,-47.719 8.627,-24.336 8.62,-24.267 8.645,-24.202 8.696,-24.156 8.696,-24.156 15.877,-20.175 15.943,-20.157 16.011,-20.17 16.066,-20.212 16.066,-20.212 28.675,-35.773 28.702,-35.826 28.707,-35.885 28.689,-35.941 28.65,-35.986 28.65,-35.986 27.986,-36.505 27.933,-36.532 27.874,-36.536 27.818,-36.517 27.774,-36.477 27.774,-36.477 17.638,-23.019 17.503,-22.898 17.331,-22.838 17.149,-22.848 16.985,-22.928 16.985,-22.928 16.801,-23.015 16.597,-23.024 16.406,-22.953 16.259,-22.813 16.259,-22.813 15.504,-21.734 15.395,-21.639 15.253,-21.606 15.113,-21.644 15.113,-21.644 10.346,-24.286 10.24,-24.385 10.193,-24.522 10.216,-24.666 10.216,-24.666 10.73,-25.877 10.771,-26.077 10.73,-26.276 10.615,-26.444 10.443,-26.554 10.443,-26.554 10.289,-26.651 10.184,-26.8 10.144,-26.977 10.175,-27.157 10.175,-27.157 17.453,-46.101 17.515,-46.2 17.611,-46.267 17.725,-46.293 17.841,-46.273 17.841,-46.273 23.283,-43.788 28.386,-40.666 28.386,-40.666 28.467,-40.582 28.51,-40.473 28.507,-40.355 28.46,-40.248 28.46,-40.248 16.909,-23.742 16.882,-23.669 16.895,-23.594 16.944,-23.534 16.944,-23.534 17.147,-23.387 17.218,-23.359 17.294,-23.37 17.354,-23.418 17.354,-23.418 30.239,-40.505 30.264,-40.558 30.267,-40.617 30.248,-40.673 30.208,-40.716 30.208,-40.716 23.802,-44.764 16.863,-47.812
  Layer 1 region: 16.84,-42.805 17.622,-42.489 17.671,-42.457 17.704,-42.407 17.715,-42.349 17.703,-42.291 17.703,-42.291 11.174,-26.921 11.127,-26.86 11.056,-26.831 10.979,-26.84 10.979,-26.84 10.747,-26.934 10.685,-26.98 10.655,-27.051 10.663,-27.127 10.663,-27.127 16.643,-42.72 16.675,-42.77 16.724,-42.804 16.781,-42.816 16.84,-42.805
  Layer 1 region: 33.799,-33.262 33.75,-33.295 33.693,-33.307 33.635,-33.296 33.586,-33.263 33.586,-33.263 20.775,-20.445 20.736,-20.378 20.735,-20.302 20.773,-20.234 20.773,-20.234 20.947,-20.054 21.013,-20.014 21.09,-20.012 21.157,-20.048 21.157,-20.048 33.607,-31.652 33.707,-31.713 33.822,-31.732 33.936,-31.705 34.031,-31.636 34.031,-31.636 34.53,-31.091 35.02,-30.538 35.02,-30.538 35.079,-30.436 35.094,-30.32 35.063,-30.207 34.991,-30.115 34.991,-30.115 22.152,-18.947 22.101,-18.918 22.043,-18.911 21.987,-18.926 21.94,-18.962 21.94,-18.962 21.831,-19.088 21.802,-19.139 21.795,-19.197 21.81,-19.253 21.846,-19.3 21.846,-19.3 34.451,-30.251 34.487,-30.298 34.502,-30.355 34.494,-30.413 34.464,-30.464 34.464,-30.464 33.9,-31.091 33.852,-31.126 33.795,-31.14 33.736,-31.131 33.686,-31.1 33.686,-31.1 20.812,-19.088 20.771,-19.024 20.767,-18.948 20.801,-18.88 20.801,-18.88 21.591,-17.971 21.654,-17.928 21.73,-17.921 21.799,-17.953 21.799,-17.953 36.592,-29.925 36.629,-29.97 36.647,-30.026 36.641,-30.085 36.613,-30.137 36.613,-30.137 35.241,-31.731 33.799,-33.262
  Layer 1 region: 33.629,-35.508 33.58,-35.539 33.522,-35.549 33.464,-35.535 33.416,-35.501 33.416,-35.501 18.566,-19.566 18.531,-19.503 18.529,-19.43 18.562,-19.366 18.562,-19.366 21.761,-15.686 21.82,-15.645 21.892,-15.636 21.96,-15.662 21.96,-15.662 37.424,-26.484 37.465,-26.527 37.486,-26.582 37.484,-26.641 37.46,-26.695 37.46,-26.695 36.964,-27.377 36.92,-27.417 36.865,-27.437 36.806,-27.434 36.752,-27.409 36.752,-27.409 23.3,-17.266 23.136,-17.187 22.954,-17.176 22.782,-17.236 22.647,-17.358 22.647,-17.358 22.494,-17.493 22.301,-17.557 22.098,-17.541 21.917,-17.447 21.917,-17.447 21.863,-17.403 21.724,-17.341 21.573,-17.354 21.447,-17.44 21.447,-17.44 20.255,-18.812 20.188,-18.948 20.195,-19.099 20.277,-19.228 20.277,-19.228 20.328,-19.275 20.446,-19.441 20.49,-19.64 20.453,-19.841 20.341,-20.01 20.341,-20.01 20.239,-20.162 20.204,-20.34 20.239,-20.519 20.34,-20.67 20.34,-20.67 33.499,-33.821 33.596,-33.886 33.711,-33.909 33.826,-33.886 33.923,-33.821 33.923,-33.821 35.599,-32.053 37.182,-30.202 37.182,-30.202 37.236,-30.099 37.247,-29.982 37.213,-29.87 37.138,-29.78 37.138,-29.78 22.798,-18.161 22.753,-18.099 22.744,-18.023 22.774,-17.952 22.774,-17.952 22.929,-17.755 22.99,-17.708 23.066,-17.698 23.137,-17.727 23.137,-17.727 38.799,-29.523 38.839,-29.566 38.858,-29.622 38.854,-29.681 38.828,-29.734 38.828,-29.734 36.344,-32.724 33.629,-35.508
  Layer 1 region: 32.199,-39.161 32.147,-39.189 32.088,-39.194 32.032,-39.177 31.987,-39.139 31.987,-39.139 16.43,-19.917 16.4,-19.855 16.401,-19.786 16.434,-19.725 16.434,-19.725 21.82,-13.528 21.876,-13.488 21.944,-13.477 22.01,-13.498 22.01,-13.498 39.181,-23.809 39.224,-23.849 39.249,-23.902 39.251,-23.961 39.231,-24.017 39.231,-24.017 38.784,-24.732 38.743,-24.775 38.689,-24.799 38.63,-24.8 38.575,-24.778 38.575,-24.778 24.448,-15.598 24.279,-15.531 24.097,-15.533 23.929,-15.605 23.802,-15.736 23.802,-15.736 23.659,-15.881 23.471,-15.959 23.267,-15.957 23.08,-15.876 23.08,-15.876 22.003,-15.121 21.867,-15.069 21.723,-15.086 21.604,-15.17 21.604,-15.17 18.029,-19.283 17.963,-19.412 17.965,-19.557 18.036,-19.684 18.036,-19.684 18.934,-20.646 19.04,-20.82 19.07,-21.022 19.019,-21.219 18.895,-21.381 18.895,-21.381 18.784,-21.525 18.736,-21.7 18.759,-21.881 18.849,-22.039 18.849,-22.039 32.168,-37.351 32.26,-37.423 32.373,-37.454 32.489,-37.439 32.591,-37.381 32.591,-37.381 36.855,-33.184 40.583,-28.505 40.583,-28.505 40.63,-28.398 40.633,-28.281 40.59,-28.172 40.509,-28.087 40.509,-28.087 24.009,-16.527 23.96,-16.468 23.946,-16.392 23.971,-16.32 23.971,-16.32 24.111,-16.112 24.169,-16.061 24.244,-16.046 24.317,-16.07 24.317,-16.07 42.269,-27.72 42.311,-27.762 42.334,-27.816 42.334,-27.874 42.312,-27.929 42.312,-27.929 37.676,-33.924 32.199,-39.161
  Layer 1 region: 30.464,-34.464 31.091,-33.9 31.126,-33.852 31.14,-33.795 31.131,-33.736 31.1,-33.686 31.1,-33.686 19.707,-21.475 19.642,-21.435 19.565,-21.431 19.497,-21.466 19.497,-21.466 19.311,-21.634 19.269,-21.698 19.264,-21.775 19.298,-21.844 19.298,-21.844 30.251,-34.451 30.298,-34.487 30.355,-34.502 30.413,-34.494 30.464,-34.464
  Layer 1 region: 1.184,-45.983 2.027,-45.954 2.084,-45.94 2.132,-45.905 2.163,-45.854 2.171,-45.796 2.171,-45.796 1.292,-29.119 1.269,-29.046 1.212,-28.994 1.137,-28.977 1.137,-28.977 0.887,-28.985 0.813,-29.008 0.76,-29.063 0.742,-29.138 0.742,-29.138 1.029,-45.836 1.041,-45.894 1.075,-45.942 1.125,-45.973 1.184,-45.983
  Layer 1 region: -0.507,-50.696 -0.564,-50.684 -0.613,-50.651 -0.644,-50.601 -0.655,-50.543 -0.655,-50.543 -0.216,-25.819 -0.199,-25.752 -0.154,-25.699 -0.09,-25.673 -0.09,-25.673 8.019,-24.389 8.088,-24.394 8.147,-24.43 8.184,-24.488 8.184,-24.488 14.71,-43.423 14.718,-43.482 14.703,-43.539 14.666,-43.586 14.615,-43.615 14.615,-43.615 13.813,-43.875 13.754,-43.882 13.697,-43.866 13.651,-43.829 13.623,-43.777 13.623,-43.777 8.702,-27.664 8.615,-27.503 8.474,-27.388 8.3,-27.336 8.119,-27.354 8.119,-27.354 7.916,-27.374 7.722,-27.312 7.567,-27.18 7.476,-26.998 7.476,-26.998 7.136,-25.726 7.065,-25.599 6.943,-25.52 6.799,-25.508 6.799,-25.508 1.416,-26.36 1.283,-26.417 1.191,-26.53 1.164,-26.672 1.164,-26.672 1.233,-27.986 1.203,-28.188 1.096,-28.362 0.93,-28.48 0.731,-28.524 0.731,-28.524 0.553,-28.563 0.404,-28.666 0.305,-28.82 0.273,-28.999 0.273,-28.999 0.633,-49.29 0.658,-49.404 0.724,-49.5 0.823,-49.564 0.938,-49.584 0.938,-49.584 6.902,-49.111 12.765,-47.922 12.765,-47.922 12.87,-47.871 12.948,-47.783 12.985,-47.672 12.978,-47.555 12.978,-47.555 7.769,-28.093 7.769,-28.016 7.807,-27.949 7.873,-27.91 7.873,-27.91 8.114,-27.841 8.191,-27.839 8.258,-27.876 8.299,-27.941 8.299,-27.941 14.561,-48.405 14.567,-48.463 14.55,-48.52 14.513,-48.565 14.461,-48.593 14.461,-48.593 7.056,-50.205 -0.507,-50.696